# EAGLE board nRF-Serial-v12-Class-Routed (EAGLE 6.6.0)
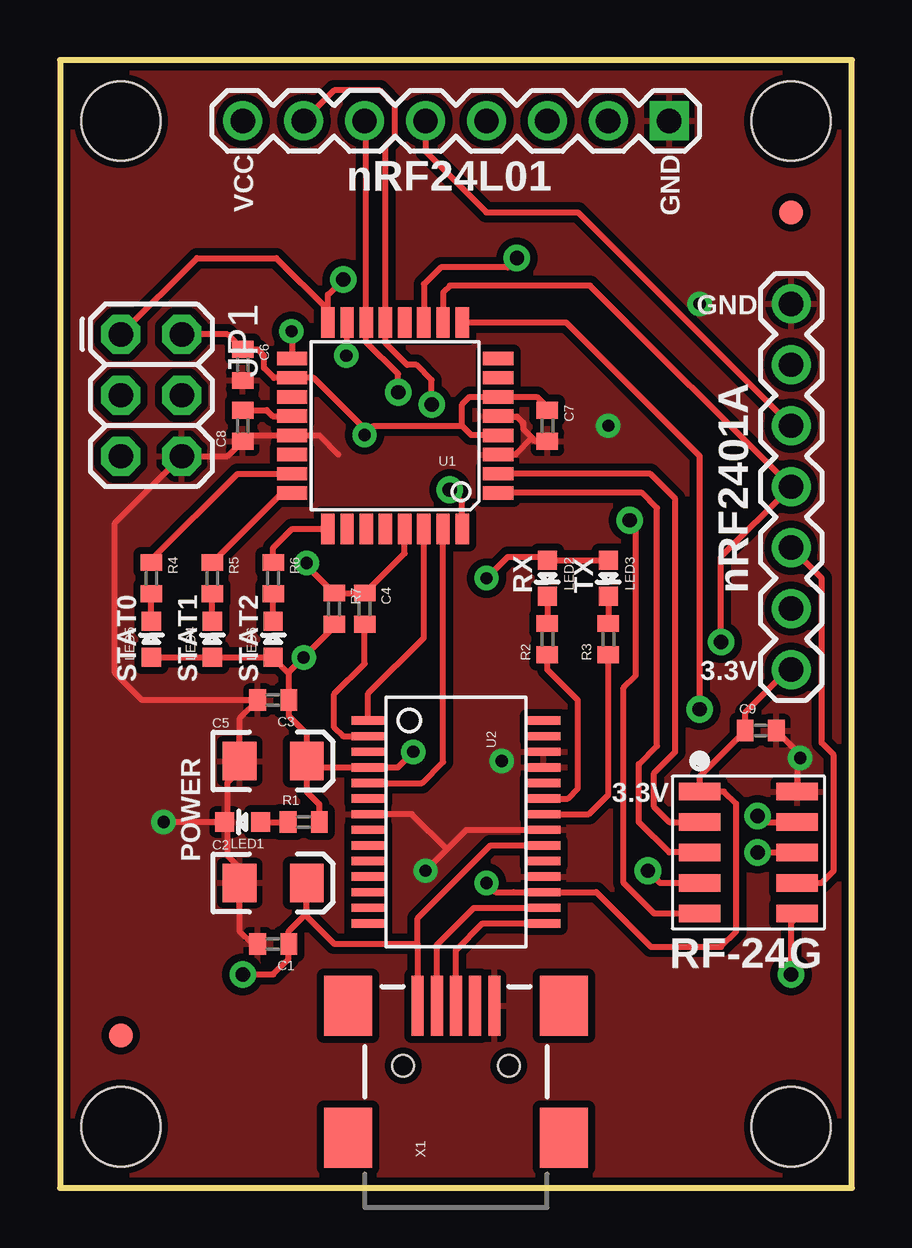
[diagram p0: board, top side]
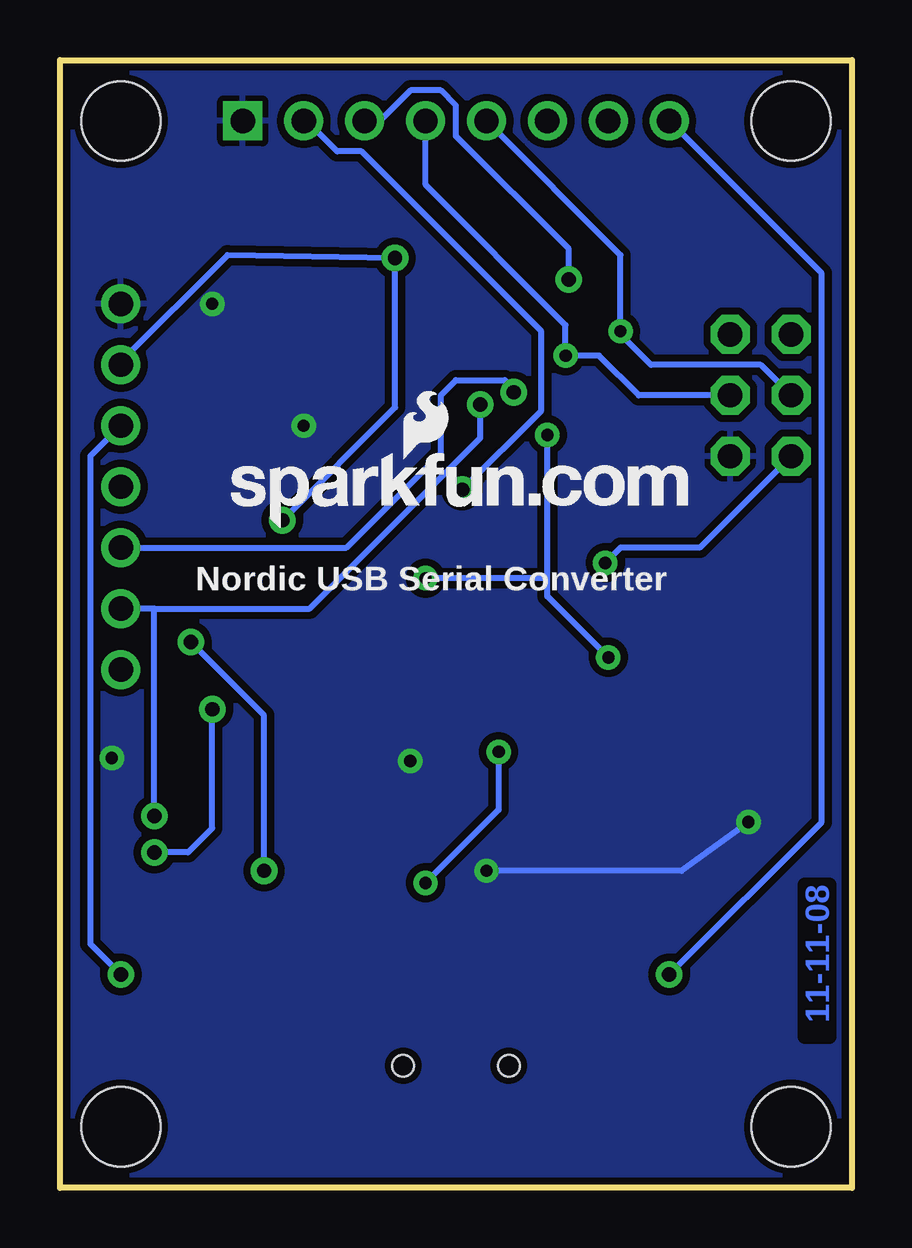
[diagram p1: board, bottom side, seen from below]

Size 33.02 x 46.99 mm. Coordinates in mm from the lower left corner, seen from the top.
Outline: 0,0 33.02,0 33.02,46.99 0,46.99 0,0
Copper layers (1*16): Top 0.035mm / dielectric 1.5mm / Bottom 0.035mm
Design rules "default": minimum track width 8mil, minimum drill 20mil, track to track 8mil, track to pad 8mil, pad to pad 8mil, via to via 8mil, smd to smd 8mil, copper to edge 10mil, drill to drill 8mil, minimum pad ring 12mil, minimum via ring 10mil, stop-mask expansion 4mil, vias tented up to drill 25mil, thermal gap 10mil
Net classes: 1 vcc: width 0.305 mm; 2 gnd: width 0.203 mm

## Footprints (pad centres in the part's own frame; a part is rotated, then mirrored left to right if it is on the bottom)
C0402 = smd 0.7 x 0.9: 1 -0.65,0; 2 0.65,0
EIA3216 = smd 1.4 x 1.6: A 1.4,0; C -1.4,0
2X3 = drill 1.016 octagon: 1 0,0; 2 0,2.54; 3 2.54,0; 4 2.54,2.54; 5 5.08,0; 6 5.08,2.54
1X08 = drill 1.016 square: 1 0,0 | drill 1.016: 2 2.54,0; 3 5.08,0; 4 7.62,0; 5 10.16,0; 6 12.7,0; 7 15.24,0; 8 17.78,0
1X07 = drill 1.016: 1 0,0; 2 2.54,0; 3 5.08,0; 4 7.62,0; 5 10.16,0; 6 12.7,0; 7 15.24,0
LED-0603 = smd 0.8 x 0.8: A 0,-0.75; C 0,0.75
TQFP32-08 = smd 1.27 x 0.559: 1 -4.293,2.8; 2 -4.293,2; 3 -4.293,1.2; 4 -4.293,0.4; 5 -4.293,-0.4; 6 -4.293,-1.2; 7 -4.293,-2; 8 -4.293,-2.8; 17 4.293,-2.8; 18 4.293,-2; 19 4.293,-1.2; 20 4.293,-0.4; 21 4.293,0.4; 22 4.293,1.2; 23 4.293,2; 24 4.293,2.8 | smd 0.559 x 1.27: 9 -2.8,-4.293; 10 -2,-4.293; 11 -1.2,-4.293; 12 -0.4,-4.293; 13 0.4,-4.293; 14 1.2,-4.293; 15 2,-4.293; 16 2.8,-4.293; 25 2.8,4.293; 26 2,4.293; 27 1.2,4.293; 28 0.4,4.293; 29 -0.4,4.293; 30 -1.2,4.293; 31 -2,4.293; 32 -2.8,4.293
SSOP28DB = smd 0.348 x 1.397: 1 -4.225,-3.656; 2 -3.575,-3.656; 3 -2.925,-3.656; 4 -2.275,-3.656; 5 -1.625,-3.656; 6 -0.975,-3.656; 7 -0.325,-3.656; 8 0.325,-3.656; 9 0.975,-3.656; 10 1.625,-3.656; 11 2.275,-3.656; 12 2.925,-3.656; 13 3.575,-3.656; 14 4.225,-3.656; 15 4.225,3.656; 16 3.575,3.656; 17 2.925,3.656; 18 2.275,3.656; 19 1.625,3.656; 20 0.975,3.656; 21 0.325,3.656; 22 -0.325,3.656; 23 -0.975,3.656; 24 -1.625,3.656; 25 -2.275,3.656; 26 -2.925,3.656; 27 -3.575,3.656; 28 -4.225,3.656
FIDUCIAL-1X2 = smd 1 x 1: 1 0,0
STAND-OFF = hole 3.302: 0,0
TRF-24G-SOCKET = smd 0.74 x 1.727: P$1 0,0; P$2 1.27,0; P$3 2.54,0; P$4 3.81,0; P$5 5.08,0; P$6 5.08,4.064; P$7 3.81,4.064; P$8 2.54,4.064; P$9 1.27,4.064; P$10 0,4.064
USB-MINIB = smd 2.5 x 0.5: D+ 2.5,0; D- 2.5,0.8; GND 2.5,-1.6; ID 2.5,-0.8; VBUS 2.5,1.6 | smd 2.5 x 2: GND@1 -3,-4.5; GND@2 -3,4.5; GND@3 2.5,4.5; GND@4 2.5,-4.5 | hole 0.9: 0,2.2; 0,-2.2

## Placement (x,y rotation side)
C1  0.1uF  [C0402]  8.89,10.16 180 top
C2  10uF  [EIA3216]  8.89,12.7 0 top
C3  0.1uF  [C0402]  8.89,20.32 180 top
C4  0.1uF  [C0402]  12.7,24.13 270 top
C5  10uF  [EIA3216]  8.89,17.78 0 top
C6  0.1uF  [C0402]  7.62,34.29 270 top
C7  0.1uF  [C0402]  20.32,31.75 270 top
C8  0.1uF  [C0402]  7.62,31.75 90 top
C9  0.1uF  [C0402]  29.21,19.05 0 top
JP1  AVR_PRG  [2X3]  2.54,35.56 270 top
JP2  nRF24L01  [1X08]  25.4,44.45 180 top
JP3  [1X07]  30.48,21.59 90 top
LED1  Red  [LED-0603]  7.62,15.24 90 top
LED2  Green  [LED-0603]  20.32,25.4 180 top
LED3  Green  [LED-0603]  22.86,25.4 180 top
LED4  Blue  [LED-0603]  6.35,22.86 0 top
LED5  Blue  [LED-0603]  3.81,22.86 0 top
LED6  Blue  [LED-0603]  8.89,22.86 0 top
R1  330  [C0402]  10.16,15.24 0 top
R2  330  [C0402]  20.32,22.86 90 top
R3  330  [C0402]  22.86,22.86 90 top
R4  330  [C0402]  3.81,25.4 270 top
R5  330  [C0402]  6.35,25.4 270 top
R6  330  [C0402]  8.89,25.4 270 top
R7  10K  [C0402]  11.43,24.13 270 top
U1  ATMEGA168  [TQFP32-08]  13.97,31.75 180 top
U2  FT232RL-BASICSSOP  [SSOP28DB]  16.51,15.24 270 top
U$1  LOGO-SFENEW  [SFE-NEW-WEBLOGO]  25.9,27.49 0 bottom
U$2  FIDUCIAL1X2  [FIDUCIAL-1X2]  2.54,6.35 0 top
U$3  FIDUCIAL1X2  [FIDUCIAL-1X2]  30.48,40.64 0 top
U$4  STAND-OFF  [STAND-OFF]  2.54,44.45 0 top
U$5  STAND-OFF  [STAND-OFF]  30.48,44.45 0 top
U$6  STAND-OFF  [STAND-OFF]  30.48,2.54 0 top
U$7  STAND-OFF  [STAND-OFF]  2.54,2.54 0 top
U$8  TRF-24G  [TRF-24G-SOCKET]  26.67,16.51 270 top
U$9  CREATIVE_COMMONS  [CREATIVE_COMMONS]  20.32,-10.16 0 top  (outside the outline)
X1  USBSMD  [USB-MINIB]  16.51,5.08 90 top

## Library data of the parts
C1-C9 JP1-JP3 LED1-LED6 R1-R7 U1 U2 U$1-U$9 X1 = SparkFun

## Nets
3.3V: C3.1 C5.A C6.1 C7.1 C9.1 JP1.2 JP3.1 LED2.A LED3.A LED4.A LED5.A LED6.A R1.2 R7.2 U1.4 U1.6 U1.18 U2.4 U2.17 U$8.P$1
CE: JP2.7 JP3.2 U1.13 U$8.P$9
CLK2: U1.9 U$8.P$8
CSN: JP2.6 JP3.3 U1.14 U$8.P$7
DATA: JP3.6 U1.11 U$8.P$5
DOUT2: U1.1 U$8.P$3
DR1: JP3.4 U1.10 U$8.P$4
DR2: U1.2 U$8.P$2
GND: C1.2 C2.C C3.2 C5.C C6.2 C7.2 C8.1 C9.2 JP1.6 JP2.1 JP3.7 LED1.C U1.3 U1.5 U1.21 U2.7 U2.18 U2.21 U2.25 U2.26 U$8.P$10 X1.GND
IRQ: JP2.2 U1.32
MISO: JP1.1 JP2.3 U1.16
MOSI: JP1.4 JP2.4 U1.15
N$1: C8.2 U1.20
N$2: C4.2 U2.2
N$3: R2.1 U2.23
N$4: R3.1 U2.22
N$5: LED3.C R3.2
N$6: LED2.C R2.2
N$9: LED5.C R4.2
N$10: LED4.C R5.2
N$11: LED6.C R6.2
N$12: LED1.A R1.1
N$16: U2.16 X1.D-
N$17: U2.15 X1.D+
RST: C4.1 JP1.5 R7.1 U1.29
RXI: U1.30 U2.1
SCK: JP1.3 JP2.5 JP3.5 U1.17 U$8.P$6
STAT0: R4.1 U1.23
STAT1: R5.1 U1.24
STAT2: R6.1 U1.25
TXO: U1.31 U2.5
VCC: C1.1 C2.A JP2.8 U2.20 X1.VBUS

## Tracks (layer width: path | path; a pad name or v marks a point on that pad's centre or on a via)
3.3V  (via drill 0.51)
  Top 0.254: 9.54,21.45 C3.1 9.54,19.67 10.29,18.92 C5.A | 9.54,21.45 8.89,22.1 LED6.A LED4.A | LED4.A 6.24,22.11 6.22,22.1 | LED5.A 3.81,22.1 3.82,22.11 LED4.A | R1.2 10.81,15.99 10.29,16.51 10.29,17.53 | C5.A 10.29,17.66 10.29,17.65 10.43,17.52 | C5.A 10.29,17.53 | v14.73,18.16 14.09,17.52 U2.4 10.3,17.52 10.29,17.53 | v17.78,12.7 18.16,12.32 18.92,12.32 18.93,12.31 U2.17 22.36,12.31 24.64,10.03 27.56,10.03 28.19,10.67 28.19,16 27.69,16.51 U$8.P$1 | 16.76,31.75 16.76,32.64 17.07,32.95 U1.6 19.88,32.95 20.32,32.51 C7.1 | 16.76,31.75 17.14,31.37 18.03,31.37 18.16,31.24 U1.4 | 9.54,21.45 9.54,21.48 v10.16,22.1 11.43,23.37 R7.2 | 20.32,26.16 20.19,26.29 18.67,26.29 v17.78,25.4 | 20.32,26.16 LED2.A | LED3.A 20.33,26.15 20.32,26.16 | 16.76,31.75 13.08,31.75 v12.7,31.37 12.7,31.62 10.57,33.75 U1.18 8.92,33.75 8.51,34.16 8.51,34.67 8.26,34.92 7.62,34.92 | U$8.P$1 26.67,17.14 28.57,19.05 | JP3.1 30.35,21.59 28.57,19.81 28.57,19.05 | 28.57,19.05 C9.1 | U$8.P$1 26.54,16.64 | 7.62,34.92 C6.1 | JP1.2 6.99,35.56 7.62,34.92
  Bottom 0.254: v14.73,18.16 14.73,15.75 v17.78,12.7 | v10.16,22.1 12.7,24.64 12.7,25.4 | 12.7,25.4 v12.7,31.37 | 12.7,25.4 v17.78,25.4
CE  (via drill 0.6)
  Top 0.254: JP2.7 11.43,45.72 13.34,45.72 13.97,45.09 13.97,43.81 13.57,43.41 U1.13 13.57,35.2 14.48,34.29 14.86,34.29 15.49,33.66 v15.49,32.64 | U$8.P$9 29.34,15.24 v29.08,15.49
  Bottom 0.254: 30.61,24.13 JP3.2 29.08,24.13 | v15.49,32.64 15.49,31.24 22.61,24.13 29.08,24.13 | v29.08,15.49 29.08,24.13
CLK2  (via drill 0.6)
  Top 0.254: U1.9 21.11,36.04 26.67,30.48 v26.67,19.94 | v29.08,13.97 U$8.P$8
  Bottom 0.254: v29.08,13.97 27.69,13.97 26.67,14.99 v26.67,19.94
CSN  (via drill 0.6)
  Top 0.254: JP2.6 12.77,44.38 U1.14 12.77,35.24 14.1,33.91 v14.1,33.15 | JP3.3 31.75,25.4 31.75,18.54 32.26,18.03 32.26,13.21 31.75,12.7 U$8.P$7 30.61,12.7
  Bottom 0.254: 30.61,26.67 JP3.3 21.08,26.67 17.14,30.61 17.14,33.02 16.51,33.66 14.48,33.66 14.1,33.27 v14.1,33.15
DATA  (via drill 0.6)
  Top 0.254: U1.11 15.17,37.65 15.88,38.35 18.67,38.35 v19.05,38.73 | U$8.P$5 24.77,11.43 23.5,12.7 23.5,20.83 24,21.34 24,27.56 v23.75,27.81
  Bottom 0.254: JP3.6 30.48,34.42 26.04,38.86 v19.05,38.73 19.05,32.51 v23.75,27.81
DOUT2
  Top 0.254: U$8.P$3 25.4,13.97 24.13,15.24 24.13,17.65 24.89,18.41 24.89,28.32 24.26,28.95 U1.1
DR1  (via drill 0.6)
  Top 0.254: U1.10 15.97,37.31 16.26,37.59 22.1,37.59 JP3.4 27.56,26.29 v27.56,22.73 | U$8.P$4 25.02,12.7 v24.51,13.21
  Bottom 0.254: v24.51,13.21 24.51,19.68 v27.56,22.73
DR2
  Top 0.254: 26.8,15.24 U$8.P$2 25.4,15.24 24.77,15.88 24.77,17.27 25.65,18.16 25.65,28.7 24.61,29.75 U1.2
GND  (via drill 0.51)
  Top 0.254: U2.21 16.95,14.91 16.13,14.1 | v15.24,13.21 16.13,14.1 | LED1.C 6.87,15.12 6.86,15.11 6.73,15.24 v4.32,15.24 | U2.7 14.66,15.56 16.13,14.1 | LED1.C 6.99,15.24 6.99,16.89 7.49,17.4 C5.C 7.49,19.55 8.26,20.32 C3.2 3.43,20.32 2.29,21.46 2.29,27.69 JP1.6 6.99,30.48 7.62,31.11 C8.1 7.62,30.99 7.98,31.35 U1.21 10.81,31.35 11.61,30.55 | LED1.C 6.86,15.24 6.99,15.11 6.99,13.84 7.49,13.34 C2.C 7.49,10.67 8,10.16 C1.2 | U1.5 18.29,32.13 19.05,32.13 19.3,31.88 19.3,31.62 19.68,31.24 | 19.68,31.24 19.81,31.11 20.32,31.11 C7.2 | U1.3 18.99,30.55 19.68,31.24 | C9.2 29.86,19.04 30.73,18.16 U$8.P$10
  Bottom 0.254: v15.24,13.21 7.11,13.21 v4.32,15.24
  other vias: 26.67,36.83 22.86,31.75 30.86,17.91 18.41,17.78
  pour Bottom (isolate 0.305): 0,0 33.02,0 33.02,46.99 0,46.99
  pour Top (isolate 0.305): 0,0 33.02,0 33.02,46.99 0,46.99
IRQ  (via drill 0.6)
  Top 0.254: U1.32 16.77,28.57 v16.26,29.08
  Bottom 0.254: v16.26,29.08 12.95,32.38 12.95,35.69 20.45,43.18 21.46,43.18 22.73,44.45 JP2.2
MISO  (via drill 0.6)
  Top 0.254: 11.17,36.45 11.17,36.58 9.02,38.73 5.71,38.73 JP1.1 | 11.17,36.45 U1.16 | 11.17,36.45 11.18,36.45 11.18,37.21 v11.81,37.85
  Bottom 0.254: JP2.3 19.68,44.45 18.41,45.72 17.14,45.72 16.51,45.09 16.51,43.81 11.81,39.12 v11.81,37.85
MOSI  (via drill 0.51)
  Top 0.254: U1.15 11.97,34.7 v11.94,34.67
  Bottom 0.254: JP1.4 8.89,33.02 10.54,34.67 v11.94,34.67 11.94,35.94 17.78,41.78 JP2.4
N$1
  Top 0.254: C8.2 8.62,32.4 8.87,32.15 U1.20
N$2
  Top 0.254: U2.2 11.79,18.82 11.43,19.18 11.43,20.57 12.7,21.84 C4.2
N$3
  Top 0.254: R2.1 20.32,21.59 21.59,20.32 21.59,16.64 21.17,16.21 U2.23
N$4
  Top 0.254: R3.1 22.86,16.38 22.04,15.56 U2.22
N$5
  Top 0.254: 22.85,24.65 22.73,24.77 | 22.85,24.65 LED3.C | R3.2 22.86,24.64 22.85,24.65
N$6
  Top 0.254: 20.32,24.77 LED2.C R2.2
N$9
  Top 0.254: 3.81,24.77 R4.2 LED5.C
N$10
  Top 0.254: 6.35,24.77 R5.2 LED4.C
N$11
  Top 0.254: LED6.C R6.2
N$12
  Top 0.254: LED1.A R1.1
N$16
  Top 0.254: U2.16 17.25,11.66 15.71,10.12 X1.D-
N$17
  Top 0.254: U2.15 17.62,11.02 16.51,9.91 X1.D+ 16.51,7.49
RST  (via drill 0.51)
  Top 0.254: v10.29,26.04 10.29,25.91 11.43,24.77 R7.1 12.69,24.78 12.7,24.77 | 12.7,24.77 C4.1 | U1.29 14.37,26.43 12.7,24.77
  Bottom 0.254: JP1.5 6.35,26.67 9.65,26.67 v10.29,26.04
RXI
  Top 0.254: U2.1 12.85,20.6 15.17,22.92 U1.30
SCK  (via drill 0.51, 0.6)
  Top 0.254: U1.17 9.68,35.66 v9.65,35.69 | JP2.5 15.24,43.18 17.78,40.64 21.59,40.64 JP3.5 | U$8.P$6 30.73,11.3 30.48,11.05 v30.48,8.89
  Bottom 0.254: JP1.3 3.81,34.29 8.38,34.29 9.65,35.56 | 9.65,35.56 v9.65,35.69 | 9.65,35.56 9.65,38.86 JP2.5 | JP3.5 31.75,30.48 31.75,10.16 v30.48,8.89
STAT0
  Top 0.254: R4.1 3.81,26.16 7.4,29.75 U1.23
STAT1
  Top 0.254: R5.1 6.35,26.04 9.27,28.95 U1.24
STAT2
  Top 0.254: U1.25 9.68,27.46 8.89,26.67 R6.1 8.89,26.04
TXO
  Top 0.254: U2.5 15.09,16.86 15.97,17.75 U1.31
VCC  (via drill 0.6)
  Top 0.254: 10.29,11.43 9.54,10.68 C1.1 9.65,10.16 9.53,10.03 9.53,9.53 8.89,8.89 v7.62,8.89 | C2.A 10.29,11.43 | 14.91,10.16 X1.VBUS | 14.91,10.16 14.91,11.23 17.95,14.27 U2.20 | 10.29,11.43 10.29,11.3 11.43,10.16 14.91,10.16
  Bottom 0.254: JP2.8 1.27,38.1 1.27,15.24 v7.62,8.89

## Text on the board
Bottom: 11-11-08
tPlace: VCC | GND | nRF24L01 | GND | RX | TX | nRF2401A | 3.3V | STAT0 | STAT1 | STAT2 | 3.3V | POWER | RF-24G | P. Dokter
bPlace: Nordic USB Serial Converter
tValues: DNP